# Altium PCB Main11_8.PcbDoc
Units mm, origin at the board's own origin, x right, y up, seen from the top; angles counter-clockwise.
Board outline 74.8 x 55.24 mm, 2 copper layers (Top Layer, Bottom Layer), stack 0.533 mm thick; 21 components, 21 nets, 79 pads, 4 vias.
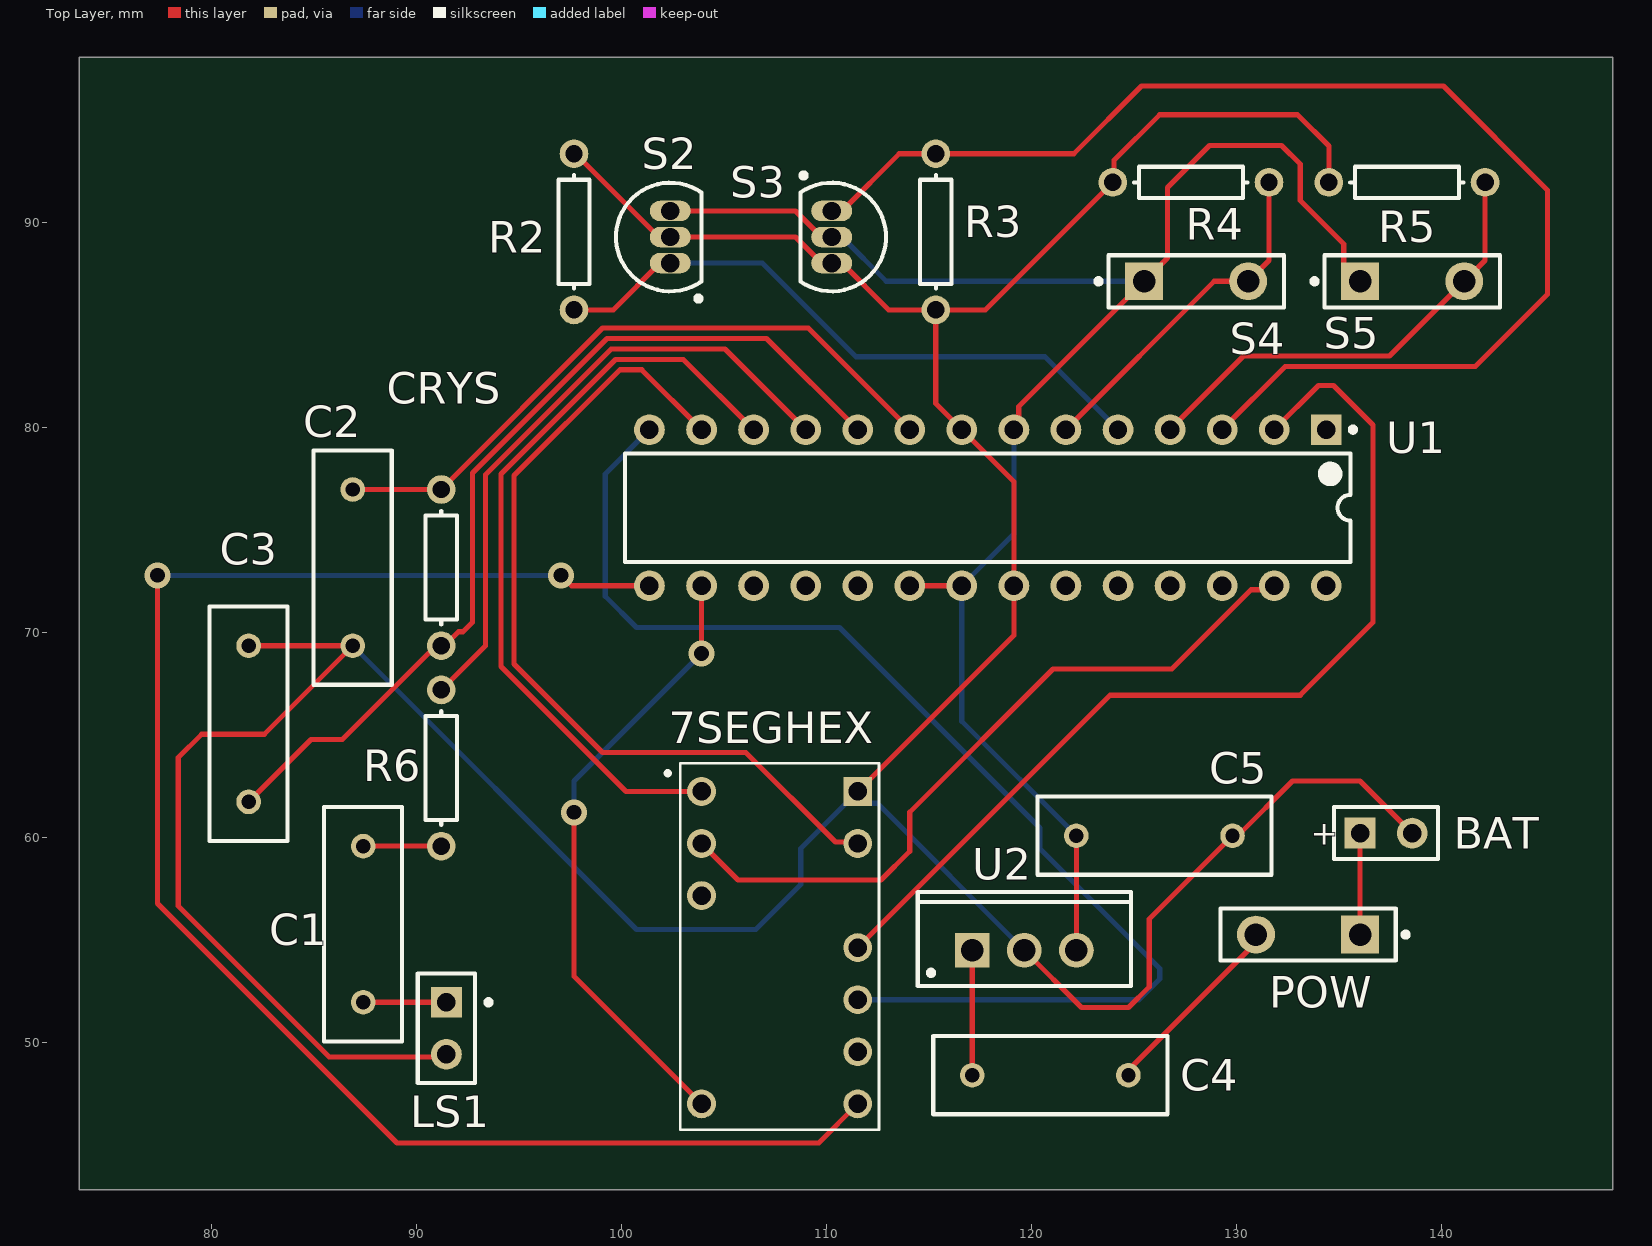
[diagram p0: Top Layer view]
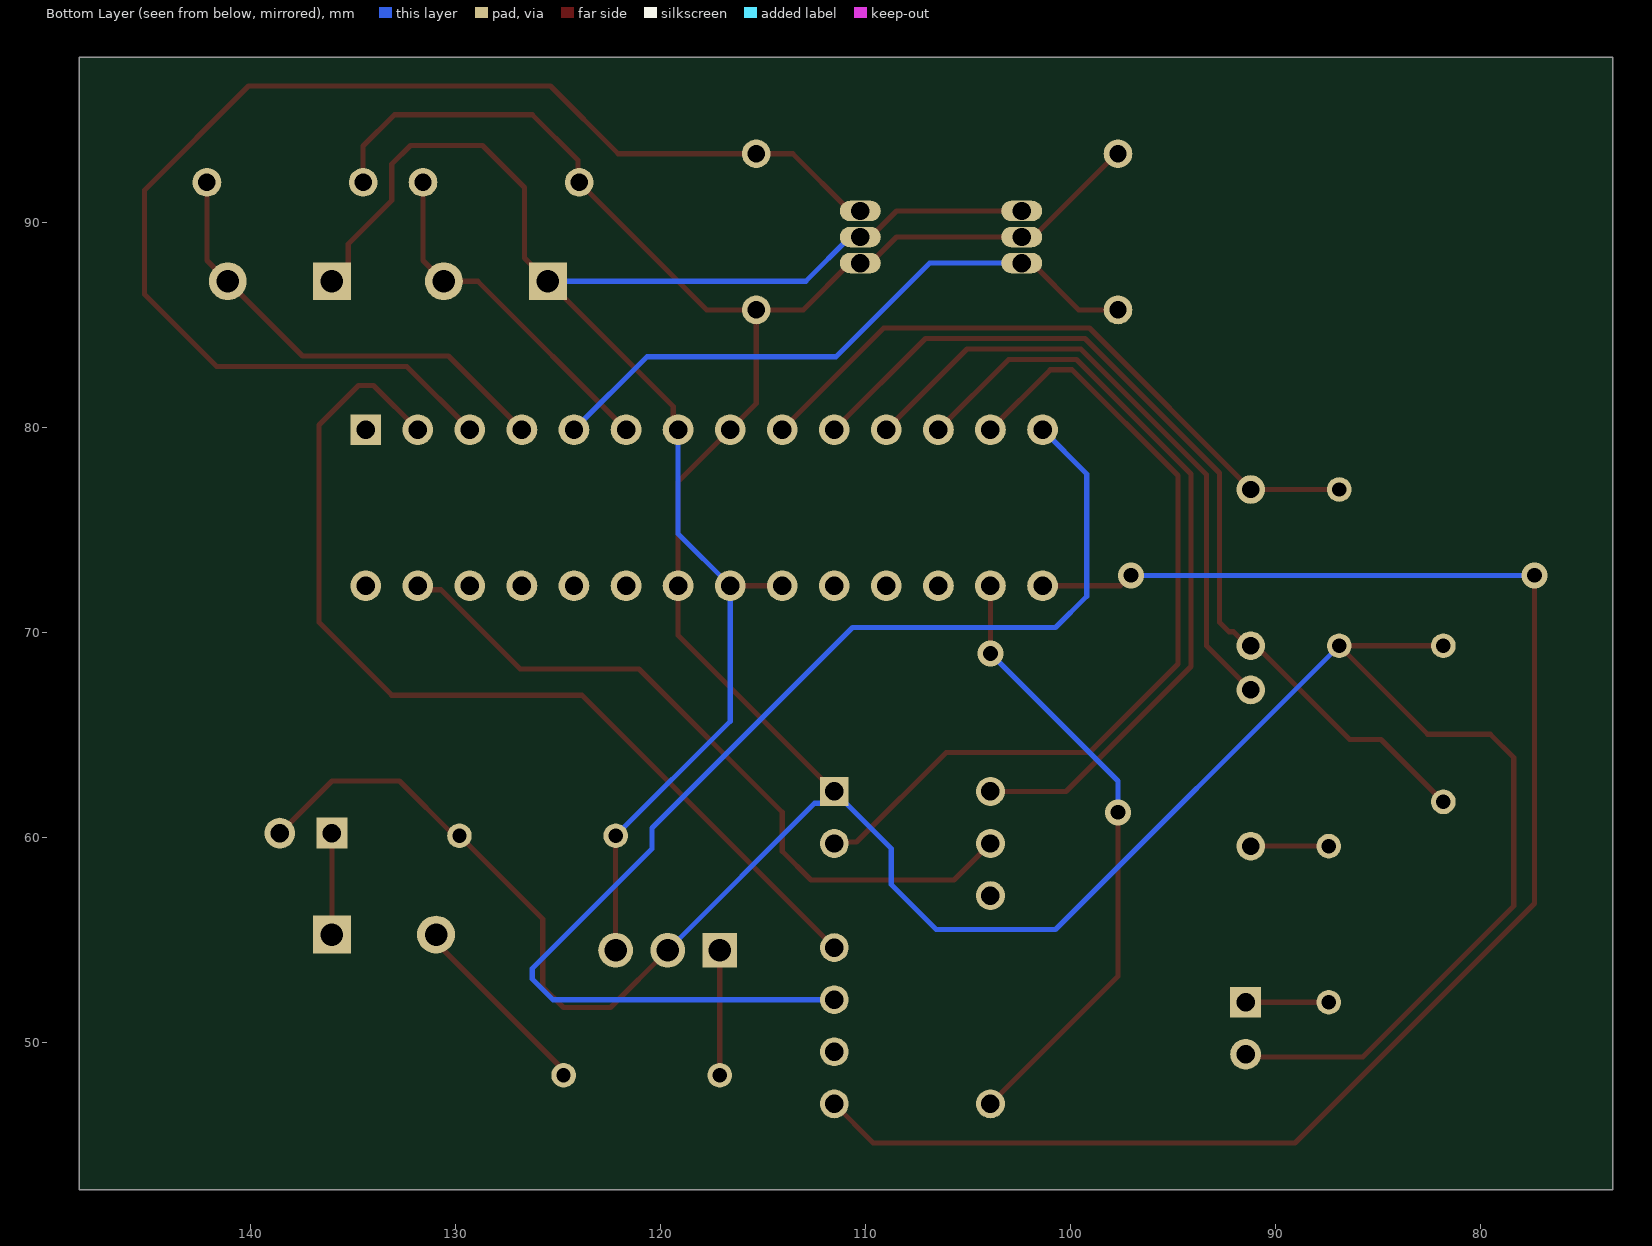
[diagram p1: Bottom Layer view, seen from below]

## Layer stack, top to bottom
Top Solder: solder mask 0.0102, Solder Resist, Dk 3.5
Top Layer: signal copper 0.0356
Dielectric 2: prepreg 0.0711, PP-006, Dk 4.1
Dielectric 1: dielectric 0.32, FR-4, Dk 4.8
Dielectric 3: prepreg 0.0711, PP-006, Dk 4.1
Bottom Layer: signal copper 0.0356
Bottom Solder: solder mask 0.0102, Solder Resist, Dk 3.5

## Board outline
73.533,42.799 73.533,98.044 148.336,98.044 148.336,42.799

## Design rules (kind name [scope] priority, off if disabled: settings)
Clearance [All] p1: gap=0.254 ignorepadtopadclearanceinfootprint=FALSE except(0: Arc-Hole Track-Hole SMDPad-Hole THPad-Hole Via-Hole Fill-Hole Poly-Hole Region-Hole Text-Hole)
PolygonConnect [All] p1: connectstyle=Relief reliefconductorwidth=0.254 reliefentries=4 polygonreliefangle="90 Angle" airgapwidth=0.254
RoutingVias [All] p1: holewidth=0.711 width=1.27 viastyle="Through Hole" minholewidth=0.711 minwidth=1.27 maxholewidth=0.711 maxwidth=1.27
SolderMaskExpansion [All] p1: expansion=0.102 istentingtop=FALSE
Width [All] p1: maxlimit=0.254 minlimit=0.254 preferedwidth=0.254
30 further rules are at their usual default settings.

## Components (designator, comment, footprint, x,y, rotation, side; value= is the part's Value field where it differs from the comment)
7SEGHEX "7SEGHEX" 7SEGHEX 101.854,44.831 r0 top
BAT "" BAT-2 137.287,60.198 r0 top (schematic designator Battery)
C1 "" RAD-0.3 87.376,55.753 r270 top value=100uF
C2 "10uF" RAD-0.3 86.868,73.152 r270 top value=100uF
C3 "10uF" RAD-0.3 81.788,65.532 r90 top value=100uF
C4 "" RAD-0.3 120.904,48.387 r0 top value=10uF
C5 "" RAD-0.3 125.984,60.071 r0 top value=10uF
CRYS "" AXIAL-0.3 91.186,73.152 r90 top value=220 (schematic designator Crystal)
LS1 "Speaker" PIN2 91.44,51.943 r270 top
POW "PowerSW" SPST-2 133.477,55.245 r180 top (schematic designator S?)
R2 "" AXIAL-0.3 97.663,89.535 r270 top value=220
R3 "" AXIAL-0.3 115.316,89.535 r90 top value=220
R4 "" AXIAL-0.3 127.762,91.948 r0 top value=220
R5 "" AXIAL-0.3 138.303,91.948 r0 top value=220
R6 "" AXIAL-0.3 91.186,63.373 r270 top value="220 (?)"
S2 "RB-Wav-26" TO-226-AA 102.362,89.281 r0 top
S3 "RB-Vel-125" TO-226-AA 110.236,89.281 r180 top
S4 "START" SPST-2 128.016,87.122 r0 top
S5 "POTEN." SPST-2 138.557,87.122 r0 top
U1 "ATmega328P-PN" 28P3 117.856,76.073 r270 top
U2 "L7805CV" TO220 119.634,54.483 r0 top

## Footprints (in the part's own frame and the unit in brackets; to place one, negate y for a bottom-side part, rotate by r counter-clockwise, add the part's x,y. Pads: shape width x height; smd on the part's side, far side on the other; paste and mask are expansions set on the pad)
7SEGHEX [mil]
  round 55.43 hole 35.43: 1(80,685) 2(80,585) 3(80,485) 4(80,85) 5(380,85) 6(380,185) 7(380,285) 8(380,385) 9(380,585)
  rect 55.43x55.43 hole 35.43: 10(380,685)
  silkscreen extent 11,35 421,739
28P3 [mm] "28-Pin Plastic Dual In-Line Package (PDIP)"
  rect 1.5x1.5 hole 0.9: 1(-3.81,16.51)
  round 1.5 hole 0.9: 2(-3.81,13.97) 3(-3.81,11.43) 4(-3.81,8.89) 5(-3.81,6.35) 6(-3.81,3.81) 7(-3.81,1.27) 8(-3.81,-1.27) 9(-3.81,-3.81) 10(-3.81,-6.35) 11(-3.81,-8.89) 12(-3.81,-11.43) 13(-3.81,-13.97) 14(-3.81,-16.51) 15(3.81,-16.51) 16(3.81,-13.97) 17(3.81,-11.43) 18(3.81,-8.89) 19(3.81,-6.35) 20(3.81,-3.81) 21(3.81,-1.27) 22(3.81,1.27) 23(3.81,3.81) 24(3.81,6.35) 25(3.81,8.89) 26(3.81,11.43) 27(3.81,13.97) 28(3.81,16.51)
  silkscreen extent -3.93,-17.7 2.65,17.94, body extent -3.6,-17.65 3.6,17.65, height 4.58
AXIAL-0.3 [mm] "Axial Device, Thru-Hole; 2 Leads; 0.3 in Pin Spacing"
  round 1.4 hole 0.85: 1(-3.81,0) 2(3.81,0)
  silkscreen extent -2.77,-0.76 2.77,0.76
BAT-2 [mm] "Battery; 2 Leads"
  rect 1.5x1.5 hole 0.9: 1(-1.27,0)
  round 1.5 hole 0.9: 2(1.27,0)
  silkscreen extent -2.54,-1.27 2.54,1.27
PIN2 [mm] "Photosensitive Diode; 2 Leads"
  rect 1.5x1.5 hole 0.9: 1(0,0)
  round 1.5 hole 0.9: 2(2.54,0)
  silkscreen extent -1.4,-1.4 3.94,2.18
RAD-0.3 [mm] "Radial Cap, Thru-Hole; 2 Leads; 0.3 in Pin Spacing"
  round 1.2 hole 0.7: 1(-3.81,0) 2(3.81,0)
  silkscreen extent -5.71,-1.91 5.71,1.91
SPST-2 [mm] "Switch; 2 Leads"
  rect 1.85x1.85 hole 1.1: 1(-2.54,0)
  round 1.85 hole 1.1: 2(2.54,0)
  silkscreen extent -4.89,-1.27 4.28,1.27
TO220 [mm] "TO, Thru-Hole, Vertical, Heatsink Mounted; 3 In-Line Leads; Pitch 2.54 mm"
  rect 1.7x1.7 hole 1.1: 1(-2.54,0)
  round 1.7 hole 1.1: 2(0,0) 3(2.54,0)
  silkscreen extent -5.2,-1.75 5.2,2.85, body extent -5.25,-1.8 5.25,2.9, height 19.7
TO-226-AA [mm] "TO, Flat Index; 3 In-Line, Axial Leads; Body Dia. 4.8mm; Leads 0.55 x 0.51 mm (max)"
  oval 2x1 hole 0.9: 1(0,-1.27) 2(0,0) 3(0,1.27)
  silkscreen extent -2.65,-3.13 1.52,2.65, body extent -2.65,-2.66 1.52,2.66, height 5.33

## Part data
7SEGHEX: "7 segment Hex display"
BAT: library part Battery, "Multicell Battery", LatestRevisionDate=17-Jul-2002, LatestRevisionNote="Re-released for DXP Platform.", PackageDescription="Battery; 2 Leads", PackageReference=BAT-2, Published=24-Mar-1999, Publisher="Altium Limited"
C1 C2 C3 C4 C5: library part Cap, "Capacitor", LatestRevisionDate=17-Jul-2002, LatestRevisionNote="Re-released for DXP Platform.", PackageDescription="Radial Cap, Thru-Hole; 2 Leads; 0.3 in Pin Spacing", PackageReference=RAD-0.3, Published=8-Jun-2000, Publisher="Altium Limited"
CRYS R2 R3 R4 R5 R6: library part Res1, "Resistor", LatestRevisionDate=17-Jul-2002, LatestRevisionNote="Re-released for DXP Platform.", PackageDescription="Axial Device, Thru-Hole; 2 Leads; 0.3 in Pin Spacing", PackageReference=AXIAL-0.3, Published=8-Jun-2000, Publisher="Altium Limited"
LS1: "Loudspeaker", LatestRevisionDate=17-Jul-2002, LatestRevisionNote="Re-released for DXP Platform.", PackageReference=PIN2, Published=24-Mar-1999, Publisher="Altium Limited"
POW S4 S5: library part SW-SPST, "Single-Pole, Single-Throw Switch", LatestRevisionDate=17-Jul-2002, LatestRevisionNote="Re-released for DXP Platform.", PackageDescription="Switch; 2 Leads", PackageReference=SPST-2, Published=24-Mar-1999, Publisher="Altium Limited"
S2 S3: library part NPN, "Mic", Code_JEDEC=TO-226-AA, LatestRevisionDate=17-Jul-2002, LatestRevisionNote="Re-released for DXP Platform.", PackageDescription="TO, Flat Index; 3 In-Line, Axial Leads; Body Dia. 4.8mm; Leads 0.55 x 0.51 mm (max)", PackageReference=TO-226-AA, Published=8-Jun-2000, Publisher="Altium Limited"
U1: library part CMP-0095-00355-1, "8-bit AVR Microcontroller, 32KB Flash, 1KB EEPROM, 2KB SRAM, 28-pin PDIP, Industrial Grade (-40°C to 105°C)", ComponentLink1Description="Manufacturer URL", ComponentLink1URL=http://www.atmel.com/, ComponentLink2Description="ATmega48A/48PA/88A/88PA/168A/168PA/328/328P Datasheet", ComponentLink2URL=http://www.atmel.com/dyn/resources/prod_documents/8271.pdf, ComponentLink3Description="ATmega48A/48PA/88A/88PA/168A/168PA/328/328P Summary", ComponentLink3URL=http://www.atmel.com/dyn/resources/prod_documents/8271S.pdf, DatasheetVersion="revD, May-2011", PackageDescription="28-lead (0.300\"/7.62mm Wide) Plastic Dual Inline Package (PDIP)", PackageReference=28P3, PackageVersion="revB, Sep-2001"
U2: library part CMP-0244-00483-1, "Positive Voltage Regulator, 5V, 3-Pin TO-220", ComponentLink1Description="Manufacturer URL", ComponentLink1URL=http://www.st.com, ComponentLink2Description=Datasheet, ComponentLink2URL=http://www.st.com/internet/com/TECHNICAL_RESOURCES/TECHNICAL_LITERATURE/DATASHEET/CD00000444.pdf, ComponentLink3Description="Package Specification", ComponentLink3URL=http://www.st.com/internet/com/TECHNICAL_RESOURCES/TECHNICAL_LITERATURE/PACKAGE_INFORMATION/CD00004649.pdf, DatasheetVersion=16/11/2011, PackageDescription="TO, Thru-Hole, Vertical, Heatsink Mounted; 3 In-Line Leads; Pitch 2.54 mm", PackageReference=TO220, PackageVersion=ver3.0

## Via types
v1: diameter 1.27, hole 0.711, Top Layer to Bottom Layer, 4 vias

## Nets (pads, with @x,y where several pads share a name; then routed paths per layer and width w, separated by ;. In a path a pad name is that pad's centre, name@x,y a point inside that pad or via, vN(x,y) a via of type N, cw(c..) or ccw(c..) an arc to the next point about the centre after c; other vN are vias at no path point)
Net7SEGHEX_1: 7SEGHEX.1 U1.12 | length 37.8
  Top Layer w0.254: 7SEGHEX.1 100.203,62.23 94.107,68.326 94.107,77.724 99.695,83.312 102.997,83.312 U1.12
Net7SEGHEX_2: 7SEGHEX.2 U1.27 | length 35.7
  Top Layer w0.254: 7SEGHEX.2 105.664,57.912 112.649,57.912 114.046,59.309 114.046,61.214 121.039,68.207 126.829,68.207 130.695,72.073 131.636,72.073 U1.27
Net7SEGHEX_4: 7SEGHEX.4 U1.16 | length 30.4
  Top Layer w0.254: v1(97.663,61.214) 97.663,53.213 7SEGHEX.4 ; v1(103.886,68.961) U1.16
  Bottom Layer w0.254: v1(97.663,61.214) 97.663,62.738 v1(103.886,68.961)
Net7SEGHEX_5: 7SEGHEX.5 U1.15 | length 80
  Top Layer w0.254: v1(77.343,72.771) 77.343,56.769 89.027,45.085 109.601,45.085 7SEGHEX.5 ; v1(97.028,72.771) 97.536,72.263 U1.15
  Bottom Layer w0.254: v1(77.343,72.771) v1(97.028,72.771)
Net7SEGHEX_7: 7SEGHEX.7 U1.14 | length 59.9
  Bottom Layer w0.254: U1.14 99.187,77.724 99.187,71.755 100.711,70.231 110.617,70.231 120.396,60.452 120.396,59.436 126.238,53.594 126.238,53.086 125.222,52.07 7SEGHEX.7
Net7SEGHEX_8: 7SEGHEX.8 U1.2 | length 47.9
  Top Layer w0.254: 7SEGHEX.8 123.825,66.929 133.096,66.929 136.652,70.485 136.652,80.115 134.725,82.042 133.985,82.042 U1.2
Net7SEGHEX_9: 7SEGHEX.9 U1.13 | length 42.1
  Top Layer w0.254: U1.13 100.965,82.804 99.905,82.804 94.742,77.641 94.742,68.453 99.06,64.135 106.045,64.135 110.421,59.759 111.437,59.759 7SEGHEX.9
Net7SEGHEX_10: 7SEGHEX.10 BAT.2 C2.2 C3.2 C5.2 LS1.2 R2.1 R3.1 R4.1 R5.1 S2.2 S3.3 U1.8 U1.22 U2.2 | length 187.7
  Top Layer w0.254: C3.2 C2.2 82.55,65.024 79.502,65.024 78.359,63.881 78.359,56.642 85.725,49.276 91.313,49.276 LS1.2 ; R2.1 97.73,93.345 101.794,89.281 S2.2 108.466,89.281 109.736,88.011 S3.3 110.736,88.011 113.022,85.725 R3.1 ; 7SEGHEX.10 119.126,69.85 U1.22 119.126,77.343 U1.8 115.316,81.153 R3.1 ; U2.2 122.428,51.689 124.714,51.689 125.73,52.705 125.73,56.007 C5.2 ; C5.2@129.794,60.188 C5.2 ; R5.1 134.493,93.726 132.969,95.25 126.238,95.25 124.017,93.029 124.017,92.013 R4.1 117.729,85.725 R3.1 ; BAT.2 136.017,62.738 132.715,62.738 130.048,60.071 C5.2
  Bottom Layer w0.254: C2.2 100.711,55.499 106.531,55.499 108.73,57.698 108.73,59.454 7SEGHEX.10 112.083,61.653 112.464,61.653 U2.2
NetBattery_1: BAT.1 POW.1 | length 5
  Top Layer w0.254: POW.1 BAT.1
NetC1_1: C1.1 R6.2 | length 3.8
  Top Layer w0.254: C1.1 R6.2
NetC1_2: C1.2 LS1.1 | length 4.1
  Top Layer w0.254: C1.2 LS1.1
NetC2_1: C2.1 CRYS.2 U1.9 | length 32.5
  Top Layer w0.254: C2.1 CRYS.2 99.06,84.836 109.093,84.836 U1.9
NetC3_1: C3.1 CRYS.1 U1.10 | length 45.2
  Top Layer w0.254: C3.1 84.836,64.77 86.36,64.77 90.932,69.342 CRYS.1 91.352,69.342 92.034,70.023 92.248,70.023 92.71,70.485 92.71,77.764 99.274,84.328 107.061,84.328 U1.10
NetC4_1: C4.1 U2.1 | length 6.1
  Top Layer w0.254: C4.1 U2.1
NetC4_2: C4.2 POW.2 | length 9.4
  Top Layer w0.254: C4.2 124.714,48.643 130.937,54.866 POW.2
NetC5_1: C5.1 S2.3 S3.2 S4.1 S5.1 U1.7 U1.20 U1.21 U2.3 | length 85.4
  Top Layer w0.254: S2.3 108.466,90.551 109.736,89.281 S3.2 ; U1.20 U1.21 ; U1.7 119.364,80.121 119.364,81.01 S4.1 126.619,88.265 126.619,91.694 128.673,93.748 132.185,93.748 133.096,92.837 133.096,91.059 135.219,88.936 135.219,87.92 S5.1 ; U2.3 C5.1
  Bottom Layer w0.254: S3.2 110.736,89.281 112.895,87.122 S4.1 ; U1.7 119.126,74.803 U1.21 116.586,65.659 C5.1
NetR2_2: R2.2 S2.1 U1.5 | length 30.9
  Top Layer w0.254: R2.2 99.576,85.725 101.862,88.011 S2.1
  Bottom Layer w0.254: S2.1 106.848,88.011 111.42,83.439 120.65,83.439 U1.5
NetR3_2: R3.2 S3.1 U1.3 | length 63.4
  Top Layer w0.254: S3.1 110.736,90.551 113.53,93.345 R3.2 122.047,93.345 125.349,96.647 140.081,96.647 145.161,91.567 145.161,86.487 141.635,82.961 132.364,82.961 U1.3 U1.3@129.413,79.883
NetR4_2: R4.2 S4.2 U1.6 | length 17.2
  Top Layer w0.254: U1.6@121.666,79.947 U1.6 128.905,87.122 S4.2 131.572,88.138 R4.2
NetR5_2: R5.2 S5.2 U1.4 | length 22.5
  Top Layer w0.254: U1.4 130.332,83.469 137.444,83.469 140.97,86.995 S5.2@141.097,86.995 ; S5.2 142.113,88.138 R5.2
NetR6_1: R6.1 U1.11 | length 31.2
  Top Layer w0.254: R6.1 93.345,69.342 93.345,77.68 99.485,83.82 105.029,83.82 U1.11
pads on no net: 7SEGHEX.3 7SEGHEX.6 U1.1 U1.17 U1.18 U1.19 U1.23 U1.24 U1.25 U1.26 U1.28

## Text inside footprints (layer, text, board x,y; h text height)
BAT: Top Overlay "+" at 133.617,59.621 h1.15